# Altium PCB PCB1.PcbDoc
Units mm, origin at the board's own origin, x right, y up, seen from the top; angles counter-clockwise.
Board outline 42.44 x 58.14 mm, 2 copper layers (Top Layer, Bottom Layer), stack 1.621 mm thick; 15 components, 29 nets, 103 pads, 202 vias.
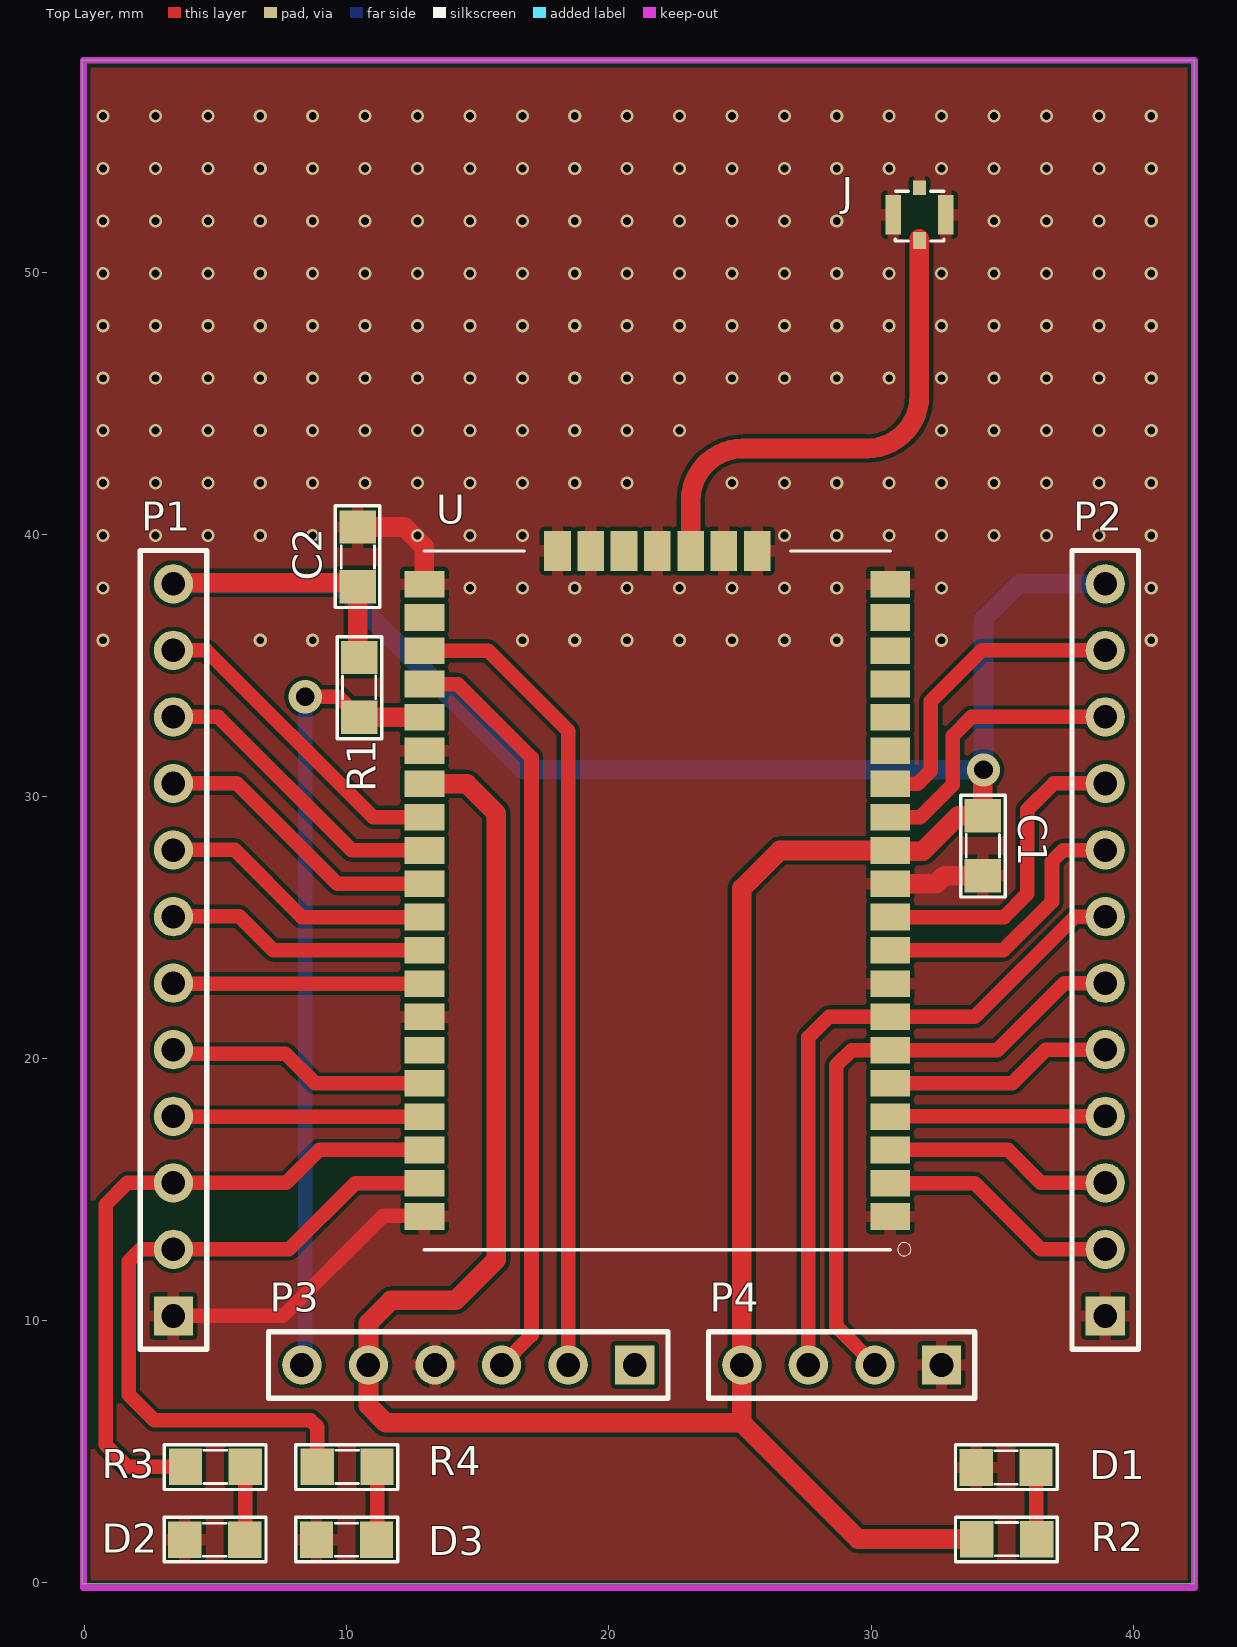
[diagram p0: Top Layer view]
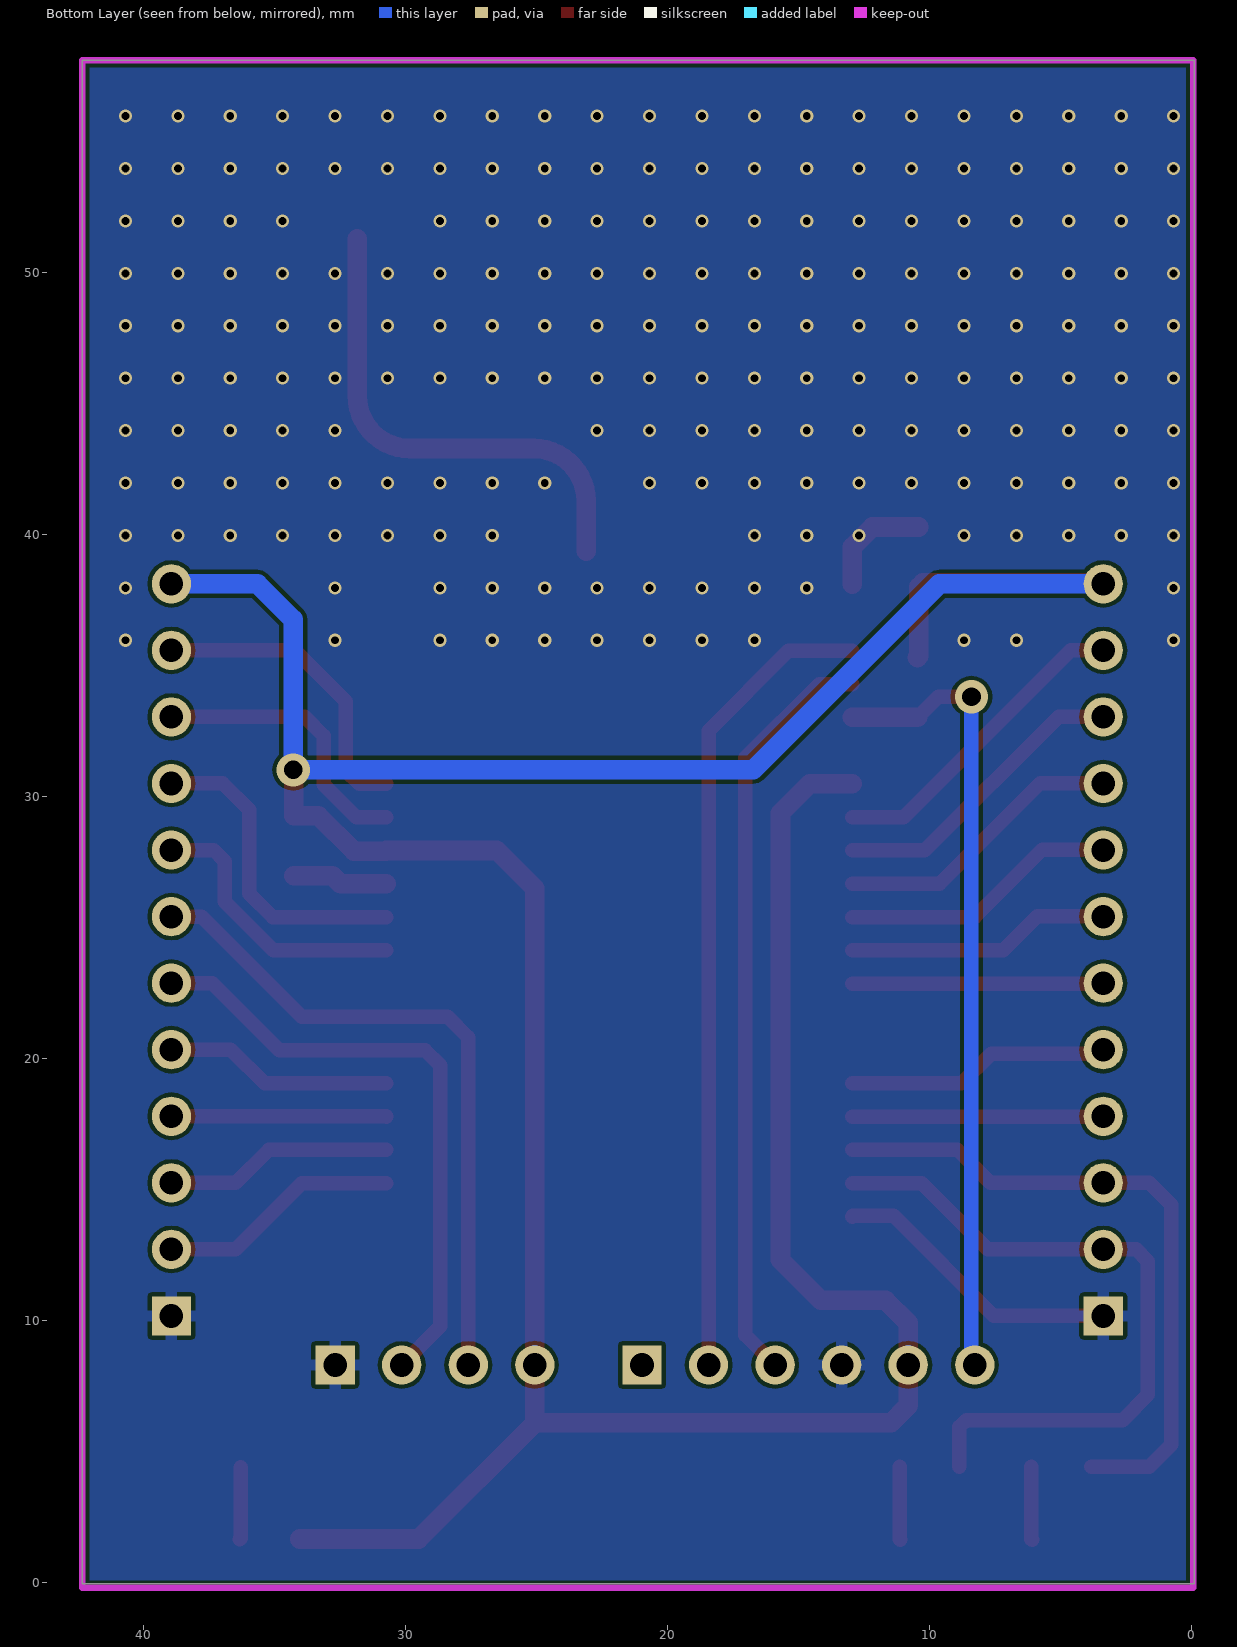
[diagram p1: Bottom Layer view, seen from below]
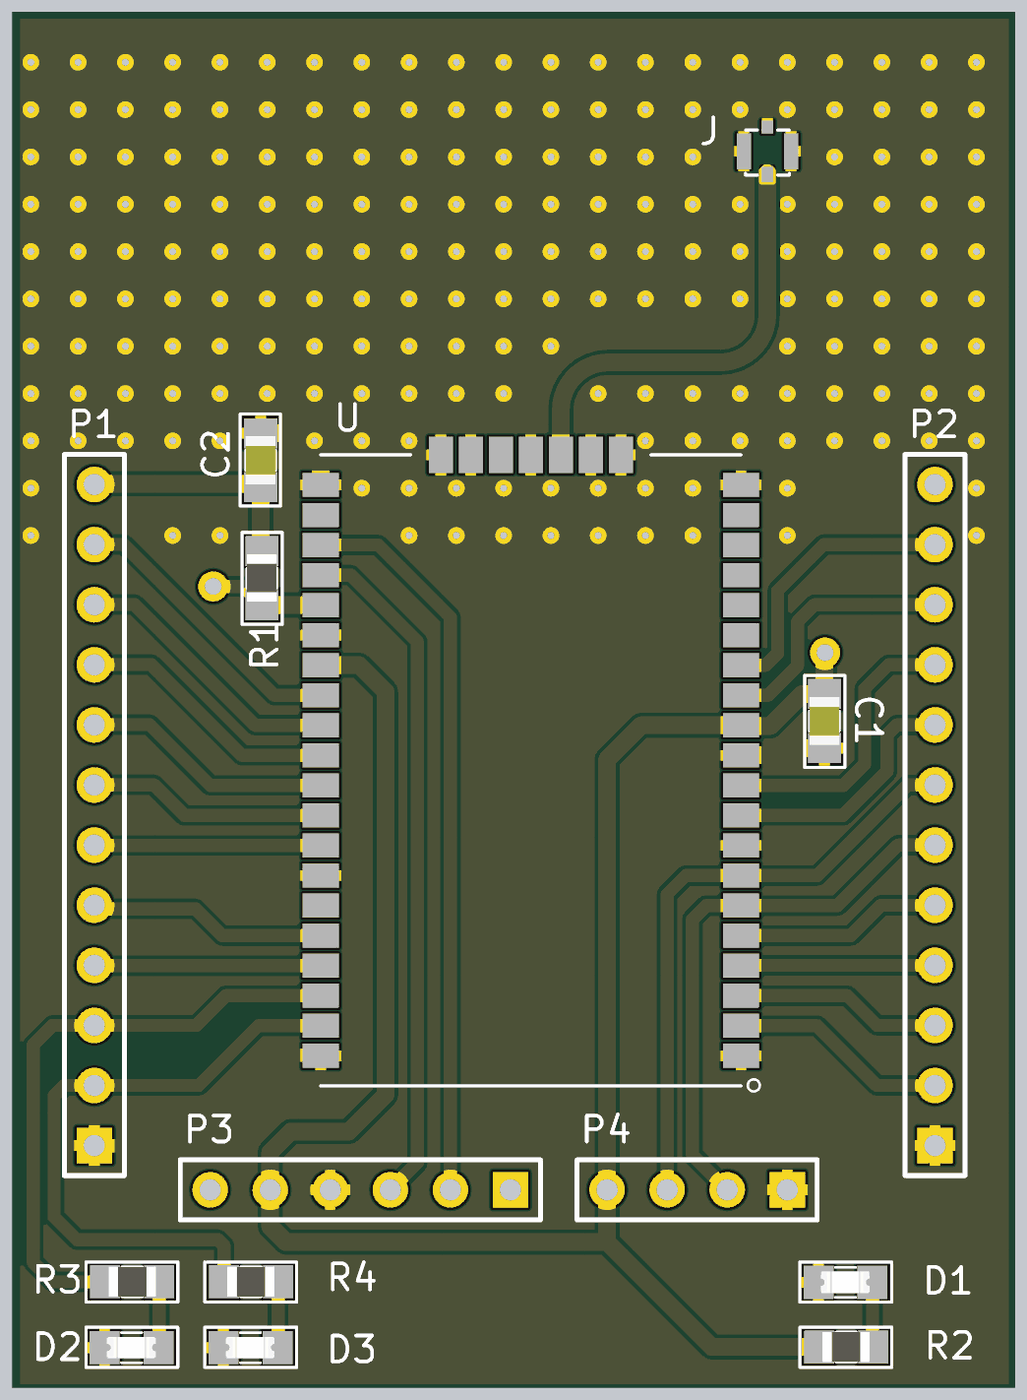
[diagram p2: 3D render of the assembled board from above, using the file's embedded part models]

## Layer stack, top to bottom
Top Solder: solder mask 0.0102, Solder Resist, Dk 3.5
Top Layer: signal copper 0.0356
Dielectric 1: dielectric 1.55, FR-4, Dk 4.8
Bottom Layer: signal copper 0.0356
Bottom Solder: solder mask 0.0102, Solder Resist, Dk 3.5

## Board outline
-0.102,-0.057 42.342,-0.057 42.342,58.084 -0.102,58.084

## Design rules (kind name [scope] priority, off if disabled: settings)
Clearance [All] p1: gap=0.15 ignorepadtopadclearanceinfootprint=FALSE
PolygonConnect [All] p1: connectstyle=Relief reliefconductorwidth=0.454 reliefentries=4 polygonreliefangle="90 Angle" airgapwidth=0.15
RoutingVias [All] p1: holewidth=0.25 width=0.5 viastyle="Through Hole" minholewidth=0.25 minwidth=0.5 maxholewidth=0.415 maxwidth=1.27
SolderMaskExpansion [All] p1: expansion=0.102
Width [All] p1: maxlimit=0.75 minlimit=0.2 preferedwidth=0.554
30 further rules are at their usual default settings.

## Components (designator, comment, footprint, x,y, rotation, side; value= is the part's Value field where it differs from the comment)
C1 "10uF" "0805 CAP" 34.265,28.112 r90 top
C2 "10uF" "0805 CAP" 10.414,39.135 r270 top
D1 "LED" "LED SMD 0805" 35.144,4.323 r180 top
D2 "LED" "LED SMD 0805" 4.943,1.565 r180 top
D3 "LED" "LED SMD 0805" 9.972,1.565 r180 top
J "RSP-122811-02" SAMTEC_RSP-122811-02 31.852,52.191 r0 top
P1 "Header 12" HDR1X12 3.378,10.169 r90 top
P2 "Header 12" HDR1X12 38.938,10.169 r90 top
P3 "Header 6" HDR1X6 20.98,8.3 r180 top
P4 "Header 4" HDR1X4 32.69,8.3 r180 top
R1 "10k" "0805 RESISTOR" 10.465,33.014 r90 top value="R1/4W - 1K"
R2 "10k" "0805 RESISTOR" 34.036,1.656 r0 top value="R1/4W - 1K"
R3 "220" "0805 RESISTOR" 3.835,4.413 r0 top value="R1/4W - 1K"
R4 "220" "0805 RESISTOR" 8.865,4.413 r0 top value="R1/4W - 1K"
U "RN2903-I/RM095" XCVR_RN2903-I/RM095 21.844,26.029 r0 top

## Footprints (in the part's own frame and the unit in brackets; to place one, negate y for a bottom-side part, rotate by r counter-clockwise, add the part's x,y. Pads: shape width x height; smd on the part's side, far side on the other; paste and mask are expansions set on the pad)
"0805 CAP" [mil] "Compoment SMD 80x50mil"
  rect 50x55 smd: 1(-45,0) 2(45,0)
  silkscreen extent -77,-34 76,33, body extent -40,-25 40,25, height 24
"0805 RESISTOR" [mil] "Compoment SMD 80x50mil"
  rect 50x55 smd: 1(0,0) 2(90,0)
  silkscreen extent -32,-34 121,33, body extent 6,-25 84,25, height 24
HDR1X4 [mm] "Connector; Header; 4 Position"
  rect 1.5x1.5 hole 0.9: 1(0,0)
  round 1.5 hole 0.9: 2(2.54,0) 3(5.08,0) 4(7.62,0)
  silkscreen extent -1.27,-1.27 8.89,1.27
HDR1X6 [mm] "Connector; Header; 6 Position"
  rect 1.5x1.5 hole 0.9: 1(0,0)
  round 1.5 hole 0.9: 2(2.54,0) 3(5.08,0) 4(7.62,0) 5(10.16,0) 6(12.7,0)
  silkscreen extent -1.27,-1.27 13.97,1.27
HDR1X12 [mm] "Connector; Header; 12 Position"
  rect 1.5x1.5 hole 0.9: 1(0,0)
  round 1.5 hole 0.9: 2(2.54,0) 3(5.08,0) 4(7.62,0) 5(10.16,0) 6(12.7,0) 7(15.24,0) 8(17.78,0) 9(20.32,0) 10(22.86,0) 11(25.4,0) 12(27.94,0)
  silkscreen extent -1.27,-1.27 29.21,1.27
"LED SMD 0805" [mil] "Compoment SMD 80x50mil"
  rect 50x55 smd: 1(-45.39,-2.58) 2(44.61,-2.58)
  silkscreen extent -77,-37 76,30, body extent -41,-21 41,15, height 33
SAMTEC_RSP-122811-02 [mm]
  rect 0.5x0.65 smd: 1(0,-0.975)
  rect 0.6x1.5 smd: 2(-1,0) 4(1,0)
  rect 0.5x0.55 smd: 3(0,1.025)
  silkscreen extent -0.93,-1 0.93,0.9
XCVR_RN2903-I/RM095 [mil]
  rect 60x40 smd: 1(350,-475) 2(350,-425) 3(350,-375) 4(350,-325) 5(350,-275) 6(350,-225) 7(350,-175) 8(350,-125) 9(350,-75) 10(350,-25) 11(350,25) 12(350,75) 13(350,125) 14(350,175) 15(350,225) 16(350,275) 17(350,325) 18(350,375) 19(350,425) 20(350,475) 28(-350,475) 29(-350,425) 30(-350,375) 31(-350,325) 32(-350,275) 33(-350,225) 34(-350,175) 35(-350,125) 36(-350,75) 37(-350,25) 38(-350,-25) 39(-350,-75) 40(-350,-125) 41(-350,-175) 42(-350,-225) 43(-350,-275) 44(-350,-325) 45(-350,-375) 46(-350,-425) 47(-350,-475)
  rect 40x60 smd: 21(150,525) 22(100,525) 23(50,525) 24(0,525) 25(-50,525) 26(-100,525) 27(-150,525)
  silkscreen extent -350,-534 381,525

## Part data
C1 C2: library part "CAP CERAMIC", LatestRevisionDate=17-Jul-2002, LatestRevisionNote="Re-released for DXP Platform.", PackageReference=RAD-0.3, Published=8-Jun-2000, Publisher="Altium Limited"
J: "IPEX MHF3 Connector Receptacle, Male Pin 50Ohm Surface Mount Solder", Package=None, Availability=Unavailable, MF="Samtec Inc.", MP=RSP-122811-02, Price=None, SnapEDA_Link=https://www.snapeda.com/parts/RSP-122811-02/Samtec%20Inc./view-part/2771725/?ref=snap
P1 P2: "Header, 12-Pin", LatestRevisionDate=17-Jul-2002, LatestRevisionNote="Re-released for DXP Platform.", Publisher="Altium Limited"
P3: "Header, 6-Pin", LatestRevisionDate=17-Jul-2002, LatestRevisionNote="Re-released for DXP Platform.", Publisher="Altium Limited"
P4: "Header, 4-Pin", LatestRevisionDate=17-Jul-2002, LatestRevisionNote="Re-released for DXP Platform.", Publisher="Altium Limited"
R1 R2 R3 R4: library part RESISTOR
U: "General ISM < 1GHz LoRa™ Transceiver Module 915MHz Antenna Not Included, SMA Surface Mount", Package="Module Microchip", Availability=Unavailable, MF=Microchip, MP=RN2903-I/RM095, Price=None, SnapEDA_Link=https://www.snapeda.com/parts/RN2903-I/RM095/Microchip/view-part/465037/?ref=snap

## Via types
v1: diameter 0.5, hole 0.3, Top Layer to Bottom Layer, 200 vias
v2: diameter 1.27, hole 0.711, Top Layer to Bottom Layer, 2 vias

## Nets (pads, with @x,y where several pads share a name; then routed paths per layer and width w, separated by ;. In a path a pad name is that pad's centre, name@x,y a point inside that pad or via, vN(x,y) a via of type N, cw(c..) or ccw(c..) an arc to the next point about the centre after c; other vN are vias at no path point)
3V3: C1.2 C2.2 P1.12 P2.12 P3.5 P4.4 R1.2 R2.1 U.12 U.34 | length 143
  Top Layer w0.75: P1.12@3.378,37.957 3.566,38.145 10.262,38.145 C2.2 10.414,35.351 R1.2 ; U.34 14.58,30.474 15.697,29.356 15.697,12.313 14.148,10.763 11.684,10.763 10.82,9.9 P3.5 10.82,6.75 11.481,6.09 25.07,6.09 ; R2.1 29.504,1.656 25.07,6.09 ; v2(34.29,31.007) 34.265,31.007 C1.2 33.325,29.255 31.979,27.908 30.759,27.908 U.12 26.518,27.934 25.07,26.486 P4.4 25.07,6.09
  Bottom Layer w0.554: P3.5@10.82,8.096 P3.5 P3.5@10.82,8.782 ; P4.4 P4.4@25.07,8.782
  Bottom Layer w0.75: P1.12 9.636,38.109 16.739,31.007 v2(34.29,31.007) 34.29,36.748 35.652,38.109 P2.12
CTS/RA6: P2.3 U.3 | length 8.7
  Top Layer w0.554: U.3 35.23,16.504 36.484,15.249 P2.3
GND: C1.1 C2.1 D1.2 D2.2 D3.2 J.2 J.3 J.4 P1.1 P2.1 P3.4 P4.1 U.1 U.8 U.11 U.20 U.21 U.22 U.24 U.26 U.27 U.28 U.33 U.41 U.47 | length 19.1
  Top Layer w0.554: P1.1 7.559,10.169 11.379,13.989 12.929,13.989 U.47
  Top Layer w0.75: C2.1 12.192,40.278 12.954,39.516 U.28 ; U.11 32.487,26.664 32.791,26.969 C1.1
  other v1: 0.693,35.956 6.693,35.956 8.693,35.956 16.693,35.956 18.693,35.956 20.693,35.956 22.693,35.956 24.693,35.956 26.693,35.956 28.693,35.956 32.693,35.956 40.693,35.956 0.693,37.956 14.693,37.956 16.693,37.956 18.693,37.956 20.693,37.956 22.693,37.956 24.693,37.956 26.693,37.956 28.693,37.956 32.693,37.956 40.693,37.956 0.693,39.956 2.693,39.956 4.693,39.956 6.693,39.956 8.693,39.956 12.693,39.956 14.693,39.956 16.693,39.956 26.693,39.956 28.693,39.956 30.693,39.956 32.693,39.956 34.693,39.956 36.693,39.956 38.693,39.956 40.693,39.956 0.693,41.956 2.693,41.956 4.693,41.956 6.693,41.956 8.693,41.956 10.693,41.956 12.693,41.956 14.693,41.956 16.693,41.956 18.693,41.956 20.693,41.956 24.693,41.956 26.693,41.956 28.693,41.956 30.693,41.956 32.693,41.956 34.693,41.956 36.693,41.956 38.693,41.956 40.693,41.956 0.693,43.956 2.693,43.956 4.693,43.956 6.693,43.956 8.693,43.956 10.693,43.956 12.693,43.956 14.693,43.956 16.693,43.956 18.693,43.956 20.693,43.956 22.693,43.956 32.693,43.956 34.693,43.956 36.693,43.956 38.693,43.956 40.693,43.956 0.693,45.956 2.693,45.956 4.693,45.956 6.693,45.956 8.693,45.956 10.693,45.956 12.693,45.956 14.693,45.956 16.693,45.956 18.693,45.956 20.693,45.956 22.693,45.956 24.693,45.956 26.693,45.956 28.693,45.956 30.693,45.956 32.693,45.956 34.693,45.956 36.693,45.956 38.693,45.956 40.693,45.956 0.693,47.956 2.693,47.956 4.693,47.956 6.693,47.956 8.693,47.956 10.693,47.956 12.693,47.956 14.693,47.956 16.693,47.956 18.693,47.956 20.693,47.956 22.693,47.956 24.693,47.956 26.693,47.956 28.693,47.956 30.693,47.956 32.693,47.956 34.693,47.956 36.693,47.956 38.693,47.956 40.693,47.956 0.693,49.956 2.693,49.956 4.693,49.956 6.693,49.956 8.693,49.956 10.693,49.956 12.693,49.956 14.693,49.956 16.693,49.956 18.693,49.956 20.693,49.956 22.693,49.956 24.693,49.956 26.693,49.956 28.693,49.956 30.693,49.956 32.693,49.956 34.693,49.956 36.693,49.956 38.693,49.956 40.693,49.956 0.693,51.956 2.693,51.956 4.693,51.956 6.693,51.956 8.693,51.956 10.693,51.956 12.693,51.956 14.693,51.956 16.693,51.956 18.693,51.956 20.693,51.956 22.693,51.956 24.693,51.956 26.693,51.956 28.693,51.956 34.693,51.956 36.693,51.956 38.693,51.956 40.693,51.956 0.693,53.956 2.693,53.956 4.693,53.956 6.693,53.956 8.693,53.956 10.693,53.956 12.693,53.956 14.693,53.956 16.693,53.956 18.693,53.956 20.693,53.956 22.693,53.956 24.693,53.956 26.693,53.956 28.693,53.956 30.693,53.956 32.693,53.956 34.693,53.956 36.693,53.956 38.693,53.956 40.693,53.956 0.693,55.956 2.693,55.956 4.693,55.956 6.693,55.956 8.693,55.956 10.693,55.956 12.693,55.956 14.693,55.956 16.693,55.956 18.693,55.956 20.693,55.956 22.693,55.956 24.693,55.956 26.693,55.956 28.693,55.956 30.693,55.956 32.693,55.956 34.693,55.956 36.693,55.956 38.693,55.956 40.693,55.956
GPIO0/RA0: P1.11 U.35 | length 12.3
  Top Layer w0.554: P1.11@3.378,35.417 3.54,35.579 4.623,35.579 10.998,29.204 U.35
GPIO1/RA1: P1.10 U.36 | length 11.8
  Top Layer w0.554: P1.10@3.378,32.877 3.54,33.039 5.08,33.039 10.185,27.934 U.36
GPIO2/RA2: P1.9 U.37 | length 11.2
  Top Layer w0.554: P1.9@3.378,30.337 3.54,30.499 5.791,30.499 9.627,26.664 U.37
GPIO3/RA3: P1.8 U.38 | length 10.7
  Top Layer w0.554: P1.8@3.378,27.797 3.54,27.959 5.715,27.959 8.28,25.394 U.38
GPIO4/RA4: P1.7 U.39 | length 10.2
  Top Layer w0.554: P1.7@3.378,25.257 3.54,25.419 5.893,25.419 7.188,24.124 U.39
GPIO5/RA5: P1.6 U.40 | length 9.6
  Top Layer w0.554: P1.6@3.378,22.717 3.515,22.854 U.40
GPIO6/RE0: P1.5 U.43 | length 10
  Top Layer w0.554: P1.5@3.378,20.177 7.655,20.177 8.788,19.044 U.43
GPIO7/RE1: P1.4 U.44 | length 9.6
  Top Layer w0.554: P1.4@3.378,17.637 3.515,17.774 U.44
GPIO8/RD2: P1.3 R3.1 U.45 | length 25.6
  Top Layer w0.554: R3.1 1.626,4.413 0.787,5.252 0.787,14.421 1.616,15.249 P1.3 7.686,15.249 8.941,16.504 U.45
GPIO9/RE2: P1.2 R4.1 U.46 | length 26.8
  Top Layer w0.554: R4.1 8.865,5.937 8.611,6.191 2.642,6.191 1.676,7.157 1.676,12.262 2.124,12.709 P1.2 7.788,12.709 10.312,15.234 U.46
GPIO10/RC5: P2.11 U.14 | length 11.9
  Top Layer w0.554: U.14 31.775,30.474 32.283,30.982 32.283,33.623 34.229,35.569 P2.11
GPIO11/RD5: P2.10 U.13 | length 10.9
  Top Layer w0.554: U.13 31.877,29.204 33.122,30.448 33.122,32.303 33.848,33.029 P2.10
GPIO12/RD7: P2.9 U.10 | length 12.2
  Top Layer w0.554: U.10 35.077,25.394 35.966,26.283 35.966,29.483 36.973,30.489 P2.9
GPIO13/RD6: P2.8 U.9 | length 10.7
  Top Layer w0.554: U.9 35.052,24.124 36.906,25.978 36.906,27.527 37.328,27.949 P2.8
M\C\L\R\/VPP: P3.6 R1.1 U.32 | length 30.4
  Top Layer w0.554: v2(8.407,33.801) 9.677,33.801 R1.1
  Top Layer w0.75: R1.1 U.32
  Bottom Layer w0.554: P3.6 8.407,8.427 v2(8.407,33.801)
NetD1_1: D1.1 R2.2 | length 2.7
  Top Layer w0.554: D1.1 36.297,1.681 R2.2
NetD2_1: D2.1 R3.2 | length 2.8
  Top Layer w0.554: D2.1 6.121,1.656 R3.2
NetD3_1: D3.1 R4.2 | length 2.8
  Top Layer w0.554: D3.1 11.151,1.656 R4.2
NetJ_1: J.1 U.23 | length 18.9
  Top Layer w0.75: U.23 23.114,41.274 cw(c25.114,41.274) 25.114,43.274 29.844,43.274 ccw(c29.844,45.274) 31.844,45.274 J.1@31.844,51.274
PGC: P3.2 U.30 | length 31
  Top Layer w0.554: U.30 15.392,35.554 18.44,32.506 P3.2
PGD: P3.3 U.31 | length 28.9
  Top Layer w0.554: U.31 14.224,34.284 17.043,31.464 17.043,9.443 P3.3
RTS/RA7: P2.2 U.2 | length 9.2
  Top Layer w0.554: U.2 33.96,15.234 36.484,12.709 P2.2
RX/RC7: P2.7 P4.3 U.7 | length 25.7
  Top Layer w0.554: P4.3 27.61,20.796 28.397,21.584 U.7 33.96,21.584 37.785,25.409 P2.7
SCL: P2.4 U.4 | length 8.2
  Top Layer w0.554: U.4 30.75,17.789 P2.4
SDA: P2.5 U.5 | length 8.7
  Top Layer w0.554: U.5 35.382,19.044 36.668,20.329 P2.5
TX/RC6: P2.6 P4.2 U.6 | length 23.6
  Top Layer w0.554: P4.2 28.677,9.773 28.677,19.73 29.261,20.314 U.6 34.823,20.314 37.379,22.869 P2.6
pads on no net: P3.1 U.15 U.16 U.17 U.18 U.19 U.25 U.29 U.42

## Polygon pours and split planes (outlines as drawn)
GND on Top Layer "Top-GND" (solid, remove dead copper, pour order 44): 0,57.982 42.189,57.982 42.342,57.83 42.342,-0.032 0.076,-0.032 0,-0.108
GND on Bottom Layer "Bottom-GND" (solid, remove dead copper, pour order 48): -0.254,57.931 42.088,57.931 42.215,58.058 42.342,57.931 42.342,-0.082 -0.127,-0.082 -0.127,58.16

## Keep-outs
Keep-Out Layer:
  lines w0.254: -0.051,-0.203 -0.051,-0.152 -0.051,58.09 42.342,58.09 42.342,-0.203 -0.051,-0.203